# Altium PCB Toradex_Colibri 5.0.PcbDoc (part 2 of 2)
Units mm, origin at the board's own origin, x right, y up, seen from the top; angles counter-clockwise.
Board outline 200 x 150 mm, 4 copper layers (Top Layer, Layer 1, Layer 2, Bottom Layer), stack 1.531 mm thick; 271 components, 262 nets, 1242 pads, 9 vias.
Unrouted connection lines stored in the file: 729.
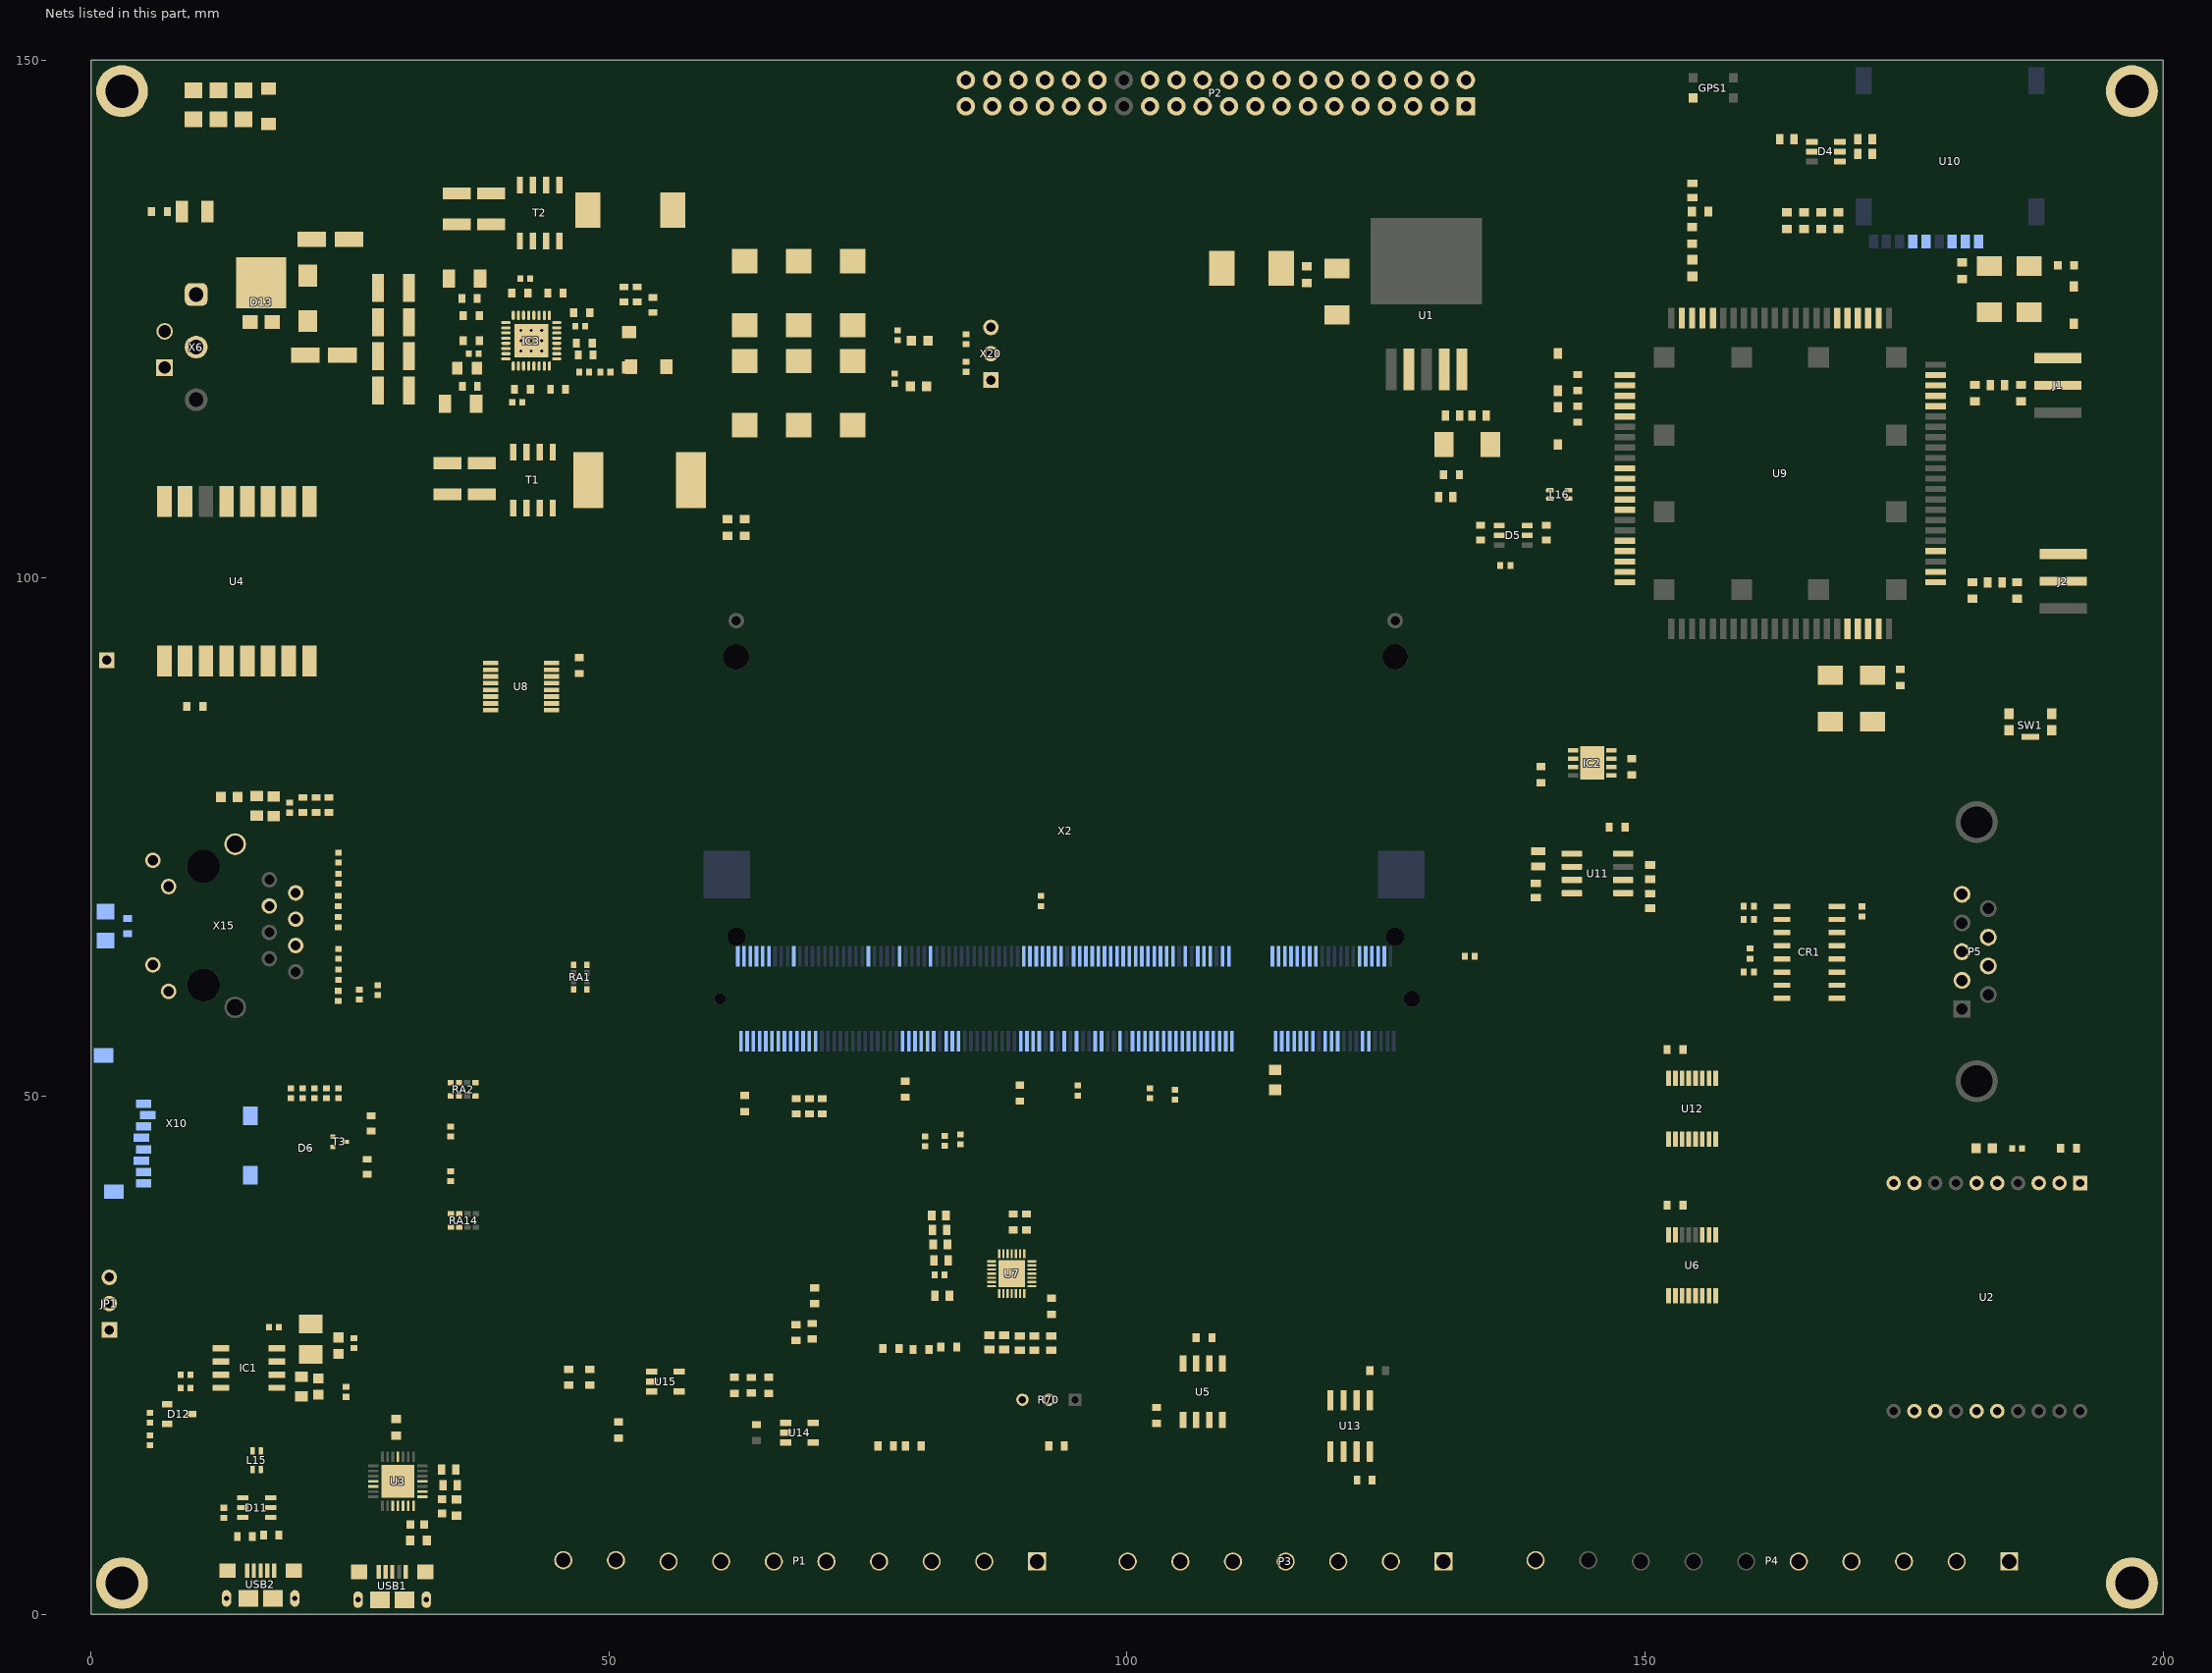
[diagram p2: the nets of this part, all layers, seen from the top]

## Part data
C1 C2 C28 C29 C39 C40: library part "Cap Pol2", "Polarized Capacitor (Axial)"
C3 C4 C5 C6 C7: library part C-X7R-100pF-50V-10%-0402, "Capacitor Ceramic X7R 100pF 50V 10% 0402"
C8 C14 C15 C16 C18 C19 C20 C21 C22 C23 C24 C25 C26 C31 C33 C45 C63 C73 C78 C79 C80 C81 C82 C83 C84 C85 C86: library part C-X7R-100nF-16V-10%-0603, "Capacitor Ceramic X7R 100nF 16V 10% 0603"
C9 C12: library part Cap, "Capacitor"
C10 C11 C13 C27 C30: library part CAP
C17: library part C-X7R-1nF-50V-10%-0402, "Capacitor Ceramic X7R 1nF 50V 10% 0402"
C32: library part C0201-0.8p, "Capacitor, NP0, ±0.05pF"
C34: library part C0201-5.1p, "Chip Cap 0201"
C35 C37: library part CMP-16466678-5, "CAP CER 10NF 50V 5% X7R 0805"
C36 C38: library part 08055C103JAT2A, "CAP CER 10NF 50V 5% X7R 0805"
C41: library part C-TA-100uF-10V-20%-3528, "Capacitor TA 100uF 10V 20% 3528"
C42 C98: library part C-X5R-22uF-10V-20%-0805, "Capacitor Ceramic X5R 22uF 10V 20% 0805"
C43 C44 C50 C51 C54 C89 C104 C115 C116 C120: library part C-X7R-100nF-16V-10%-0402, "Capacitor Ceramic X7R 100nF 16V 10% 0402"
C46 C47 C48: library part CAP, "CAP CER 33PF 50V C0G/NP0 0603"
C49: library part CAP, "CAP CER 0.1UF 16V X7R 0603"
C52 C53: library part C-X5R-47uF-10V-20%-0805, "Capacitor Ceramic X5R 47uF 10V 20% 0805"
C55: library part C-X5R-10uF-10V-20%-0805, "Capacitor Ceramic X5R 10uF 10V 20% 0805"
C56: library part C-X5R-1uF-16V-20%-0603, "Capacitor Ceramic X5R 1uF 16V 20% 0603"
C57: library part C-X5R-10uF-6.3V-20%-0603, "Capacitor Ceramic X5R 10uF 6.3V 20% 0603"
C58: library part C-X5R-22uF-25V-20%-1210, "Capacitor Ceramic X5R 22uF 25V 20% 1210"
C59 C77: library part C-X7R-1nF-50V-10%-0603, "Capacitor Ceramic X7R 1nF 50V 10% 0603"
C60: library part C-X7R-100nF-50V-10%-0603, "Capacitor Ceramic X7R 100nF 50V 10% 0603"
C61 C62 C71 C72: library part C-X5R-10uF-50V-20%-1210, "Capacitor Ceramic X5R 10uF 50V 20% 1210"
C64 C65 C66 C74 C75 C76: library part C-TA-150uF-10V-10%-7343, "Capacitor TA 150uF 10V 20% 7343"
C67 C68 C69: library part C-X5R-10uF-50V-10%-1210, "Capacitor Ceramic X5R 10uF 50V 10% 1210"
C70: library part C-X7R-2.7nF-50V-10%-0402, "Capacitor Ceramic X7R 2.7nF 50V 10% 0402"
C99 C100 C101: library part C-X5R-4.7uF-10V-10%-0603, "Capacitor Ceramic X5R 4.7uF 10V 10% 0603"
C131 C133 C134 C135: library part C-X7R-1nF-2KV-10%-1206, "Capacitor Ceramic X7R 1nF 2KV 10% 1206"
D1 D2 D3: library part "D Zener", "Zener Diode"
D4: library part CMP-924f5b40f9684d88-1, "ESDA Series 5 Channel 6.1 V 50 pF SMT Uni Directional Transil Array - SOT-23-6L"
D5 D11: library part D-Semtech-RClamp0504S, "TVS Array low cap"
D6: library part D-TI-TPD2EUSB30DRTR, "2 Channel Protection for Super Speed USB3.0"
D8: "Bidirectional ESD protection"
D12: library part D-Philips-BAT54C-Schottky, "BAT54C Schottky Diode"
D13: library part D-Vishay-SS8P6C-M3/86A, "Diode Schottky, SS8P6C-M3/86A, 60V(Vrrm), 8A(If)"
E1: library part Antenna, "Generic Antenna"
F1: library part F-Littelfuse-0458008.DR, "Fast Fuse, Rated 8A, 63V(DC), 1206 (3216 Metric)"
F2: "Fuse"
FB1: library part "Fuse 1", "Fuse"
GPS1: library part 1462350001_GPS, "ANTENNA MOLDED 1.575GHZ GPS"
IC1: library part IC-TI-TPS2042BD, "Dual High Side Switch With OC_DET 500mA/CH"
IC2: "Integrated Circuit"
IC3: library part IC-TI-TPS51120, "Power Supply Controller"
J1 J2: library part U.FL-R-SMT-1(10), "RECPT ULTRA-MINI COAX SMD"
JP1: library part CON-Tyco-826936-3-1X3-2.54mm-JP, "Jumper, 3-Pin"
L1: library part L0201-3n3, "Chip Inductor"
L2: library part L-Wurth-744771008-8.2uH-6.25A-20%, "Inductance 8.2uH 6.25A 20%"
L3: library part L-Wurth-7447797470-4.7uH-6.2A-20%, "Inductance 4.7uH 6.2A 20%"
L15 L16: library part L-Murata-DLW21SN900SQ2-90R@100MHz-330mA-25%, "Common Mode Choke High Speed 90R 330mA"
L17 L18 L19: library part L-220R@100MHz-2A-25%-0603, "220R@100MHz 2A EMI FILTER"
L23 L29: library part L-Laird-35F0121-0SR-10-10A-25%, "Power Supply FB 10A"
LED1 LED2 LED3: library part LED-Avago-HSMG-C190, "Surface mount LED green 20mA"
MH1 MH2 MH3 MH4: "PCB Mounting Holes, hole diemeter = 3.2mm, pad diameter = 6.2mm"
P1 P4: library part "Header 10", "Header, 10-Pin"
P2: library part RASPI_GPIO_B+_PIN
P3: library part "Header 7", "Header, 7-Pin"
P5: library part "Header 9", "2301843-1"
R1 R2 R3 R7 R8 R10 R77 R79 R87: library part R-22R-63mW-5%-0402, "Resistor 22 ohm 63mW 5% 0402"
R4 R5 R6 R9 R11 R12 R13 R14 R15 R16 R17 R18 R23 R25 R67 R68: library part Res1, "Resistor"
R19 R56: library part R-10KR-63mW-1%-0402, "Resistor 10 Kohm 63mW 1% 0402"
R20 R21 R22: library part R-100R-63mW-5%-0603, "Resistor 100 ohm 63mW 5% 0603"
R24 R27 R42 R55: library part R-100KR-63mW-5%-0603, "Resistor 100 Kohm 63mW 5% 0603"
R26: library part R0201-0R, "Resistor, ±5%, 0.05W"
R28 R29: library part CRCW08050000Z0EAHP, "RES SMD 0.0 OHM JUMPER 1/3W 0805"
R30 R58 R59 R60: library part R-15KR-63mW-5%-0603, "Resistor 15 Kohm 63mW 5% 0603"
R31 R32 R33: library part Res1, "RES SMD 1K OHM 1% 1/10W 0603"
R34 R36 R46 R54: library part R-0R-63mW-1%-0603, "Resistor 0 ohm 63mW 1% 0603"
R35 R38 R53: library part R-4.7R-63mW-5%-0402, "Resistor 4.7 ohm 63mW 5% 0402"
R37 R39 R139: library part R-0R-63mW-1%-1206, "Resistor 0 ohm 63mW 1% 1206"
R40 R41: library part R-0R-63mW-1%-1210, "Resistor 0 ohm 63mW 1%"
R43: library part R-15mR-250mW-1%-1206, "Resistor 15 mohm 250mW 1% 1206"
R44: library part R-6.2KR-63mW-1%-0402, "Resistor 6.2 Kohm 63mW 1% 0402"
R45: library part R-3.6KR-63mW-1%-0603, "Resistor 3.6 Kohm 63mW 1% 0603"
R47 R48 R51 R52: library part R-49.9R-100mW-1%-0402, "Resistor 49.9 ohm 100mW 1% 0402"
R49 R50 R61: library part R-100KR-63mW-5%-0402, "Resistor 100 Kohm 63mW 5% 0402"
R57: library part R-24mR-250mW-1%-1206, "Resistor 24 mohm 250mW 1% 1206"
R62: library part R-3.3KR-63mW-1%-0603, "Resistor 3.3 Kohm 63mW 1% 0603"
R63 R64 R65: library part CMP-1909346-3, "RES SMD 10K OHM 1% 1/8W 0805"
R66 R82 R116: library part R-1KR-63mW-5%-0402, "Resistor 1 Kohm 63mW 5% 0402"
R69 R71 R72 R73 R74 R75 R76 R78 R80: "Resistor"
R70: "Potentiometer"
R81 R115: library part R-560R-63mW-5%-0402, "Resistor 560 ohm 63mW 5% 0402"
R95 R96: library part R-150R-63mW-5%-0402, "Resistor 150 ohm 63mW 5% 0402"
R101: library part R-33KR-63mW-5%-0402, "Resistor 33 Kohm 63mW 5% 0402"
R102 R103 R104 R105: library part R-68KR-63mW-5%-0402, "Resistor 68 Kohm 63mW 5% 0402"
R121 R122 R123: library part R-0R-63mW-5%-0603, "Resistor 0 ohm 63mW 5% 0603"
R138: library part R-1MR-63mW-5%-0603, "Resistor 1 Mohm 63mW 5% 0603"
RA1 RA2 RA14: library part RA-22R-63mW-5%-1206-div, "Resistor Array 22 R 63mW 5% 1206"
SW1: library part SW_CnK-KMR211GLFS-1VA, "Power ON Switch"
T1 T2: library part T-Fairchild-FDS6982AS-N, "N-Channel PowerTrench SyncFET"
T3: "N-Channel 20V (D-S)  MOSFET"
U2: "General ISM < 1GHz Transceiver Module 900MHz Antenna Not Included, RP-SMA Through Hole"
U3: "USB Bridge, USB to UART USB 2.0 UART Interface 28-QFN (5x5)"
U4: library part RFM95
U7: "24 Bit Analog to Digital Converter 5, 10 Input 1 Sigma-Delta 28-TQFN _4x4_"
U10: "Micro SIM Card Connector - Push-Push Type, 8 Pin, SMT, 1.50mm Profile"
U11: "Real Time Clock (RTC) IC Clock/Calendar IÂ²C, 2-Wire Serial 8-SOIC (0.154, 3.90mm Width)"
U13: "1/1 Transceiver Full RS422, RS485 8-SOIC"
USB1 USB2: library part "USB Micro-B"
X2: library part CON-Tyco-1473005-1-200-0.6mm, "SODIMM Connector"
X3: library part XTAL_SMD2016_32MHz_8pF_Epson, "XTAL SMD 2016, 32MHz, Cl=8pF, Tol: ±10ppm, Stab: ±10ppm"
X6: library part CON-SwitchCraft-RAPC722X, "Barrel Power Connector"
X10: library part CON-Wurth-693071010811, "Micro SD Holder Push Push CD"
X15: library part CON-Pulse-JX0011D21BNL, "RJ45 connector with magentics, 10/100 Base-TX, AutoMDIX, Through Hole"
X17: library part CON-Tyco-284512-2-1x2-3.5mm, "Terminal Block Power Connector"
X20: library part CON-Tyco-826936-3-1X3-2.54mm, "Header, 3-Pin"

## Via types
v1: diameter 0.6, hole 0.3, Top Layer to Bottom Layer, 9 vias

## Nets (pads, with @x,y where several pads share a name; then routed paths per layer and width w, separated by ;. In a path a pad name is that pad's centre, name@x,y a point inside that pad or via, vN(x,y) a via of type N, cw(c..) or ccw(c..) an arc to the next point about the centre after c; other vN are vias at no path point)
3.3V: C3.1 C9.1 C10.1 C14.2 C16.2 C18.2 C20.2 C22.2 C23.2 C24.2 C25.2 C26.2 C74.1 C75.1 C76.1 C78.2 C79.2 C85.2 C86.2 C98.2 C99.1 C100.1 C101.1 C116.1 CR1.16 IC2.3 IC2.6 IC2.7 IC3.8 L3.2 L19.1 P2.1 P2.17 P4.1 R6.1 R24.2 R27.2 R49.2 R50.2 R61.2 R63.2 R64.2 R65.2 R81.2 R101.2 R102.2 R103.2 R104.2 R105.2 U2.1 U3.6 U4.5 U5.5 U7.14 U7.20 U7.23 U8.16 U11.8 U14.2 U15.2 X2.40 X2.42 X2.84 X2.108 X2.148 X2.182 X2.198 X2.200 X10.4 X15.9 X15.12 X20.3
5V: C19.2 C64.1 C65.1 C66.1 C115.2 IC1.2 P2.2 P2.4 R40.2 R41.2 R82.2 U5.3 X20.1
5V_PMIC: IC3.1 L2.2 R41.1
5V_USB_D: R40.1 USB2.1
6ULL_PWM_E: R10.2 U6.10
6ULL_SPI2_CLK/8X_UARTB_RX: U8.13 U12.5 X2.36
6ULL_SPI2_CS0/8X_UARTB_TX: U8.10 U12.2 X2.38
6ULL_SPI2_MISO/8X_UARTB_RTS: U8.3 U12.11 X2.34
6ULL_UARTF_RXD: U6.6 X2.57
6ULL_UARTF_TXD: U6.3 X2.61
6ULL_UARTG_CTS: U12.13 X2.68
6ULL_UARTG_RTS: U12.10 X2.82
6ULL_UARTG_RX: U12.6 X2.56
6ULL_UARTG_TX: U12.3 X2.44
8X_PWM_J: U6.11 X2.138
8X_SPI2_CLK: U8.14 X2.96
8X_SPI2_CS0: U8.11 X2.29
8X_SPI2_MISO: U8.2 X2.37
8X_SPI2_MOSI: U8.5 X2.103
8X_UARTB_CTS: U12.14 X2.32
8X_UARTD_RXD: U6.5 X2.30
8X_UARTD_TXD: U6.2 X2.28
ADC_GPIO0: U7.21 X2.50
ADC_GPIO1: U7.16 X2.52
ADC_REF1P: R69.2 R71.1 U7.27
AIN4: C80.1 C81.2 R13.2 U7.7
AIN5: C81.1 C82.2 R14.2 U7.8
AIN6: R15.1 U14.1 U14.4
AIN7: R16.1 U15.1 U15.4
AIN8: R17.1 R70.3
AIN9: R18.1 R70.2 R72.2 U7.25
ANT_AUX: C35.2 R28.1 U9.59
ANT_GNSS: L1.1 U9.79
ANT_MAIN: C37.2 R29.1 U9.82
AUDIO_AGND: X2.9 X2.11
AUDIO_AVCC: X2.10 X2.12
CAN1_RX.3.3V: U5.4 X2.63
CAN1_STB: U5.8 X2.158
"CAN1_TX 3.3V": U5.1 X2.55
CANH: P3.5 U5.7
CANL: P3.6 U5.6
CHASSIS_GND: C131.2 C133.1 C134.1 C135.1 MH1.1 MH2.1 MH3.1 MH4.1 R138.2 R139.2 SW1.5 X15.S2
ETH_AVCC: C52.1 C53.1 L19.2
ETH_CT_RX: C54.2 R122.2
ETH_CT_TX: C89.2 R123.2 X15.4
ETH_LINK_ACT: R95.2 X2.183
ETH_RXI_N: R52.1 X2.193 X15.6
ETH_RXI_P: R51.2 X2.195 X15.3
ETH_SPEED: R96.1 X2.185
ETH_TX0_N: R48.1 X2.187 X15.2
ETH_TX0_P: R47.2 X2.189
GND: C1.2 C2.2 C3.2 C5.1 C6.1 C9.2 C10.2 C11.2 C12.2 C13.2 C14.1 C15.1 C16.1 C18.1 C19.1 C20.1 C21.1 C22.1 C23.1 C24.1 C26.1 C27.2 C28.2 C29.2 C30.2 C31.1 C33.1 C34.1 C35.1 C36.1 C37.1 C38.1 C39.2 C40.2 C41.2 C42.1 C43.1 C44.1 C45.1 C46.2 C47.2 C48.2 C49.2 C50.1 C51.1 C52.2 C53.2 C54.1 C55.1 C56.1 C57.1 C58.1 C59.1 C61.1 C62.1 C64.2 C65.2 C66.2 C67.1 C68.1 C69.1 C70.1 C71.1 C72.1 C74.2 C75.2 C76.2 C77.1 C78.1 C80.2 C82.1 C83.1 C84.1 C86.1 C89.1 C98.1 C99.2 C100.2 C101.2 C104.1 C115.1 C116.2 C120.1 C131.1 C133.2 C134.2 C135.2 CR1.15 D1.2 D2.1 D3.1 D4.2 D5.2 D6.3 D11.2 IC1.1 IC2.2 IC2.5 IC2.9 IC3.5 IC3.17 IC3.24 IC3.32 IC3.33 J1.2 J2.2 JP1.2 L23.2 LED1.1 LED2.1 P1.9 P1.10 P2.6 P2.9 P2.14 P2.20 P2.25 P2.30 P2.34 P2.39 P3.7 P4.10 P5.5 R9.2 R23.2 R25.2 R30.1 R36.1 R39.1 R43.2 R57.2 R58.1 R59.1 R60.1 R66.2 R69.1 R72.1 R76.2 R80.2 R116.2 R138.1 SW1.1 SW1.3 T3.2 U2.10 U3.3 U3.29 U4.2 U4.9 U4.16 U5.2 U6.8 U6.15 U7.13 U7.24 U7.26 U7.28 U7.29 U8.8 U8.15 U9.1 U9.2 U9.5 U9.10 U9.14 U9.37 U9.40 U9.41 U9.43 U9.57 U9.58 U9.60 U9.61 U9.64 U9.65 U9.77 U9.78 U9.80 U9.81 U10.C5 U11.4 U12.8 U12.15 U13.4 U14.5 U15.5 USB1.5 USB1.6 USB2.5 USB2.6 X2.39 X2.41 X2.83 X2.109 X2.147 X2.181 X2.191 X2.197 X2.199 X10.6 X10.S1 X10.S2 X20.2
  other v1: 41.508,121.916 42.508,121.916 43.508,121.916 41.508,122.916 42.508,122.916 43.508,122.916 41.508,123.916 42.508,123.916 43.508,123.916
GND_IN: C60.1 D8.2 D13.A1 D13.A2 L23.1 R139.1 X6.2 X17.1
GW_PWM_0: P4.2 R7.2
GW_PWM_1: P4.3 R2.2
GW_PWM_2: P4.4 U6.9
GW_PWM_3: P4.5 R79.2
I2C_SCL: IC2.1 P2.5 R64.1 RA1.5 U11.6
I2C_SCL_S: RA1.1 X2.196
I2C_SDA: IC2.8 P2.3 R63.1 RA1.8 U11.5
I2C_SDA_S: RA1.4 X2.194
LCD_RS: P2.18 X2.107
LORA_CS: U4.13 U8.9
LORA_DIO0: U4.6 X2.27
LORA_DIO1: U4.7 X2.69
LORA_DIO2: U4.8 X2.71
LORA_DIO3: U4.3 X2.77
LORA_DIO4: U4.4 X2.98
LORA_DIO5: U4.15 X2.99
LORA_MISO: U4.10 U8.4
LORA_MOSI: U4.11 U8.7
LORA_SCK: U4.12 U8.12
LTE_PWRKEY: C31.2 D2.2 U9.3
LTE_RESET: C33.2 D3.2 U9.4
MA_INP: P1.7 R73.2
MM_CD: R24.1 RA2.8 T3.3
MM_CD_S: RA2.4 X2.43
MM_CLK: RA2.6 X10.5
MM_CLK_S: RA2.2 X2.47
MM_CMD: R101.1 RA14.5 X10.3
MM_CMD_S: RA14.1 X2.190
MM_DAT_0: R103.1 RA14.6 X10.7
MM_DAT_0_S: RA14.2 X2.192
MM_DAT_1: R102.1 RA2.5 X10.8
MM_DAT_1_S: RA2.1 X2.49
MM_DAT_2: R1.2 R105.1 X10.1
MM_DAT_2_S: R1.1 X2.51
MM_DAT_3: R3.2 R104.1 X10.2
MM_DAT_3_S: R3.1 X2.53
MMC_CD: D6.1 R27.1 T3.1 X10.CD1 X10.CD2
MUX_SEL: U6.1 U8.1 U12.1 X2.104
NetC1_1: C1.1 C27.1 F2.2 U1.2
NetC4_1: C4.1 CR1.3
NetC4_2: C4.2 CR1.1
NetC5_2: C5.2 CR1.2
NetC6_2: C6.2 CR1.6
NetC7_1: C7.1 CR1.5
NetC7_2: C7.2 CR1.4
NetC8_1: C8.1 U13.1
NetC13_1: C13.1 U3.18
NetC15_2: C15.2 U7.22
NetC17_1: C17.1 U7.5
NetC17_2: C17.2 U7.6
NetC25_1: C25.1 U6.16
NetC28_1: C28.1 C29.1 C30.1 FB1.1 U9.62 U9.63
NetC32_1: C32.1 L1.2
NetC32_2: C32.2 C34.2 R26.1
NetC36_2: C36.2 J1.1 R28.2
NetC38_2: C38.2 J2.1 R29.2
NetC41_1: C41.1 IC1.7 L17.1
NetC42_2: C42.2 IC1.6 L18.1
NetC50_2: C50.2 R47.1 R48.2 R121.1
NetC51_2: C51.2 R51.1 R52.2
NetC63_1: C63.1 IC3.26 L2.1 T1.3 T1.7 T1.8
NetC63_2: C63.2 IC3.28
NetC70_2: C70.2 R44.1
NetC73_1: C73.1 IC3.15 L3.1 T2.3 T2.7 T2.8
NetC73_2: C73.2 IC3.13
NetC77_2: C77.2 R56.1
NetC79_1: C79.1 U12.16
NetC83_2: C83.2 R74.1 R75.2
NetC84_2: C84.2 R75.1 U14.3
NetD4_1: D4.1 R33.2 U10.C7
NetD4_5: D4.5 R31.2 U10.C2
NetD4_6: D4.6 R32.2 U10.C3
NetD8_1: D8.1 D13.K F1.2 L29.1
NetE1_1: E1.1 U4.1
NetGPS1_1: GPS1.1 R26.2
NetIC3_2: IC3.2 R44.2
NetIC3_7: IC3.7 R56.2
NetIC3_9: IC3.9 R34.2
NetIC3_11: IC3.11 R55.1
NetIC3_12: IC3.12 R46.2 R54.2
NetIC3_14: IC3.14 R53.1
NetIC3_16: IC3.16 T2.2
NetIC3_18: IC3.18 R57.1 R62.1 T2.1
NetIC3_23: IC3.23 R43.1 R45.1 T1.1
NetIC3_25: IC3.25 T1.2
NetIC3_27: IC3.27 R38.1
NetIC3_29: IC3.29 R37.2 R39.2
NetIC3_30: IC3.30 R42.1 R46.1
NetIC3_31: IC3.31 R36.2
NetLED1_2: LED1.2 R81.1
NetLED2_2: LED2.2 R82.1
NetLED3_1: LED3.1 R66.1
NetR4_2: R4.2 R25.1 U1.5
NetR6_2: R6.2 U3.9
NetR9_1: R9.1 U3.11
NetR11_2: R11.2 U7.1
NetR12_2: R12.2 U7.2
NetR15_2: R15.2 U7.9
NetR16_2: R16.2 U7.10
NetR17_2: R17.2 U7.11
NetR18_2: R18.2 U7.12
NetR20_2: R20.2 X2.175
NetR21_2: R21.2 X2.177
NetR22_2: R22.2 X2.179
NetR38_2: R38.2 T1.4
NetR53_2: R53.2 T2.4
NetR67_2: R67.2 U7.3
NetR68_2: R68.2 U7.4
NetR73_1: R73.1 R74.2 R76.1
NetR78_1: R78.1 R80.1 U15.3
NetR95_1: R95.1 X15.10
NetR96_2: R96.2 X15.11
NetR121_2: R121.2 R122.1 R123.1
NetU11_1: U11.1 X3.1
NetU11_2: U11.2 X3.2
PWM_A_S: R7.1 X2.59
PWM_B_S: R2.1 X2.67
PWM_E_S: R10.1 X2.102
PWM_F_S: R79.1 X2.4
PWR_EN: R34.1 R37.1 R54.1
PWR_IN: C60.2 F1.1 F2.1 X6.1 X17.2
RECOVERY: JP1.1 R19.2
RESET_EXT#: SW1.2 SW1.4 X2.26
RPI_GPIO04: P2.7 X2.23
RPI_GPIO05: P2.29 X2.6
RPI_GPIO06: P2.31 X2.62
RPI_GPIO12: P2.32 X2.85
RPI_GPIO13: P2.33 X2.65
RPI_GPIO16: P2.36 X2.64
RPI_GPIO18: P2.12 X2.48
RPI_GPIO19: P2.35 X2.78
RPI_GPIO20: P2.38 X2.66
RPI_GPIO21: P2.40 X2.8
RPI_GPIO22: P2.15 X2.60
RPI_GPIO23: P2.16 X2.95
RPI_GPIO26: P2.37 X2.76
RPI_GPIO27: P2.13 X2.31
RPI_RST: P2.22 X2.106
RPI_TP_IRQ: P2.11 X2.45
RPI_URXD: P2.10 U6.7
RPI_UTXD: P2.8 U6.4
RS232_D_CTS: CR1.13 P5.8
RS232_D_RTS: CR1.14 P5.7
RS232_D_RXD: CR1.8 P5.2
RS232_D_TXD: CR1.7 P5.3
RS485_RX_N: P3.3 R5.2 U13.8
RS485_RX_P: P3.4 R5.1 U13.7
RS485_TX_N: P3.1 U13.6
RS485_TX_P: P3.2 U13.5
RTC_MFP_IO: R65.1 U11.3 X2.100
RTD_WIRE0: P1.1 R11.1
RTD_WIRE1: P1.2 R12.1
RTD_WIRE2: P1.3 R67.1 R68.1
RTD_WIRE3: P1.4 R71.2
SIM1_CLK: C47.1 R32.1 U9.19
SIM1_DATA: C46.1 R33.1 U9.17
SIM1_RST: C48.1 R31.1 U9.18
SIM1_VDD: C49.1 D4.4 U9.20 U10.C1
SODIMM_91_S: R19.1 X2.91
SPI1_CLK: P2.23 U7.19 X2.88
SPI1_CS0: U7.18 X2.86
SPI1_CS1: P2.24 X2.72
SPI1_CS2: P2.26 X2.80
SPI1_MISO: P2.21 U7.15 X2.90
SPI1_MOSI: P2.19 U7.17 X2.92
SPI2_MOSI: U8.6 X2.133
T20_SD_BOOT: JP1.3 R20.1 R21.1 R22.1
TC_WIRE0: P1.5 R13.1
TC_WIRE1: P1.6 R14.1
UART_A_RXD: U3.26 X2.33
UART_A_TXD: U3.25 X2.35
UART_C_RXD: U13.2 X2.19
UART_C_TXD: U13.3 X2.21
USB_C_DET: D11.4 D12.1 D12.2 R8.2 R115.2 R116.1
USB_C_DET_S: R8.1 X2.137
USB_CLIENT_N: D11.6 L15.2 R58.2 USB2.2
USB_CLIENT_P: D11.1 L15.3 R60.2 USB2.3
USB_DBG_N: U3.5 USB1.2
USB_DBG_P: U3.4 USB1.3
USB_HOST_N: D5.3 L16.2 R30.2 U9.12
USB_HOST_P: D5.4 L16.3 R59.2 U9.13
USB_ID: D11.3 D12.3 IC1.4 R61.1 USB2.4
USB_OC: IC1.5 IC1.8 R50.1 R77.2
USB_OC_S: R77.1 X2.131
USB_P_EN: IC1.3 R49.1 R87.2
USB_P_EN_S: R87.1 X2.129
USBC_N: L15.1 X2.145
USBC_P: L15.4 X2.143
USBH_N: L16.1 X2.141
USBH_P: L16.4 X2.139
V5FILT: C56.2 IC3.3 IC3.6 IC3.20 R35.1 R42.2 R45.2 R55.2 R62.2
V_SUPPLY_FILT: C58.2 C61.2 C62.2 C67.2 C68.2 C69.2 C71.2 C72.2 IC3.22 L29.2 T1.5 T1.6 T2.5 T2.6
V_USB: C11.1 C12.1 U3.7 U3.8 USB1.1
VBAT: C2.1 C21.2 C39.1 C40.1 C45.2 D1.1 FB1.2 R4.1 R23.1 U1.4 U9.38 U9.39
VCC_USB1: C44.2 C120.2 D5.5 L17.2
VCC_USB2: C43.2 C104.2 D11.5 L18.2 R115.1 U9.11
VOLT_INP: P1.8 R78.2
VREF2: C59.2 IC3.4
VREG3: C57.2 IC3.19
VREG5: C55.2 IC3.10 IC3.21 R35.2
ZBEE_232_CTS: CR1.12 U2.12 U12.12
ZBEE_232_RTS: CR1.11 U2.16 U12.9
ZBEE_232_RXD: CR1.9 U2.2 U12.7
ZBEE_232_TXD: CR1.10 U2.3 U12.4
ZBEE_ASSOC: U2.15 X2.73
ZBEE_RSSI_LED: LED3.2 U2.6
ZBEE_RST: U2.5 X2.105
ZBEE_SLP_REQ: U2.9 X2.70
ZBEE_STATUS: U2.13 X2.74
pads on no net: C8.2 C85.1 D4.3 D5.1 D5.6 D6.2 GPS1.2 IC2.4 J1.3 J1.4 J1.5 J2.3 J2.4 J2.5 P2.27 P2.28 P4.6 P4.7 P4.8 P4.9 P5.1 P5.4 P5.6 P5.9 P5.S1 P5.S2 R70.1 RA1.2 RA1.3 RA1.6 RA1.7 RA2.3 RA2.7 RA14.3 RA14.4 RA14.7 RA14.8 U1.1 U1.3 U1.6 U2.4 U2.7 U2.8 U2.11 U2.14 U2.17 U2.18 U2.19 U2.20 U3.1 U3.2 U3.10 U3.12 U3.13 U3.14 U3.15 U3.16 U3.17 U3.19 U3.20 U3.21 U3.22 U3.23 U3.24 U3.27 U3.28 U4.14 U6.12 U6.13 U6.14 U9.6 U9.7 U9.8 U9.9 U9.15 U9.16 U9.21 U9.22 U9.23 U9.24 U9.25 U9.26 U9.27 U9.28 U9.29 U9.30 U9.31 U9.32 U9.33 U9.34 U9.35 U9.36 U9.42 U9.44 U9.45 U9.46 U9.47 U9.48 U9.49 U9.50 U9.51 U9.52 U9.53 U9.54 U9.55 U9.56 U9.66 U9.67 U9.68 U9.69 U9.70 U9.71 U9.72 U9.73 U9.74 U9.75 U9.76 U9.83 U9.84 U9.85 U9.86 U9.87 U9.88 U9.89 U9.90 U9.91 U9.92 U9.93 U9.94 U9.95 U9.96 U9.97 U9.98 U9.99 U10.1 U10.2 U10.3 U10.4 U10.C4 U10.C6 U10.C8 U10.CD U11.7 USB1.4 X2. X2.1 X2.2 X2.3 X2.5 X2.7 X2.13 X2.14 X2.15 X2.16 X2.17 X2.18 X2.20 X2.22 X2.24 X2.25 X2.46 X2.54 X2.58 X2.75 X2.79 X2.81 X2.87 X2.89 X2.93 X2.94 X2.97 X2.101 X2.110 X2.111 X2.112 X2.113 X2.114 X2.115 X2.116 X2.117 X2.118 X2.119 X2.120 X2.121 X2.122 X2.123 X2.124 X2.125 X2.126 X2.127 X2.128 X2.130 X2.132 X2.134 X2.135 X2.136 X2.140 X2.142 X2.144 X2.146 X2.149 X2.150 X2.151 X2.152 X2.153 X2.154 X2.155 X2.156 X2.157 X2.159 X2.160 X2.161 X2.162 X2.163 X2.164 X2.165 X2.166 X2.167 X2.168 X2.169 X2.170 X2.171 X2.172 X2.173 X2.174 X2.176 X2.178 X2.180 X2.184 X2.186 X2.188 X2.BE1 X2.BE2 X6.3 X15. X15.1 X15.5 X15.7 X15.8 X15.S1

## Keep-outs
Keep-Out Layer:
  the board outline again, w0.1